# Altium PCB OneFader_Screen.PcbDoc
Units mm, origin at the board's own origin, x right, y up, seen from the top; angles counter-clockwise.
Board outline 62.1 x 43.6 mm, 2 copper layers (Top Layer, Bottom Layer); 12 components, 9 nets, 39 pads, 0 vias.
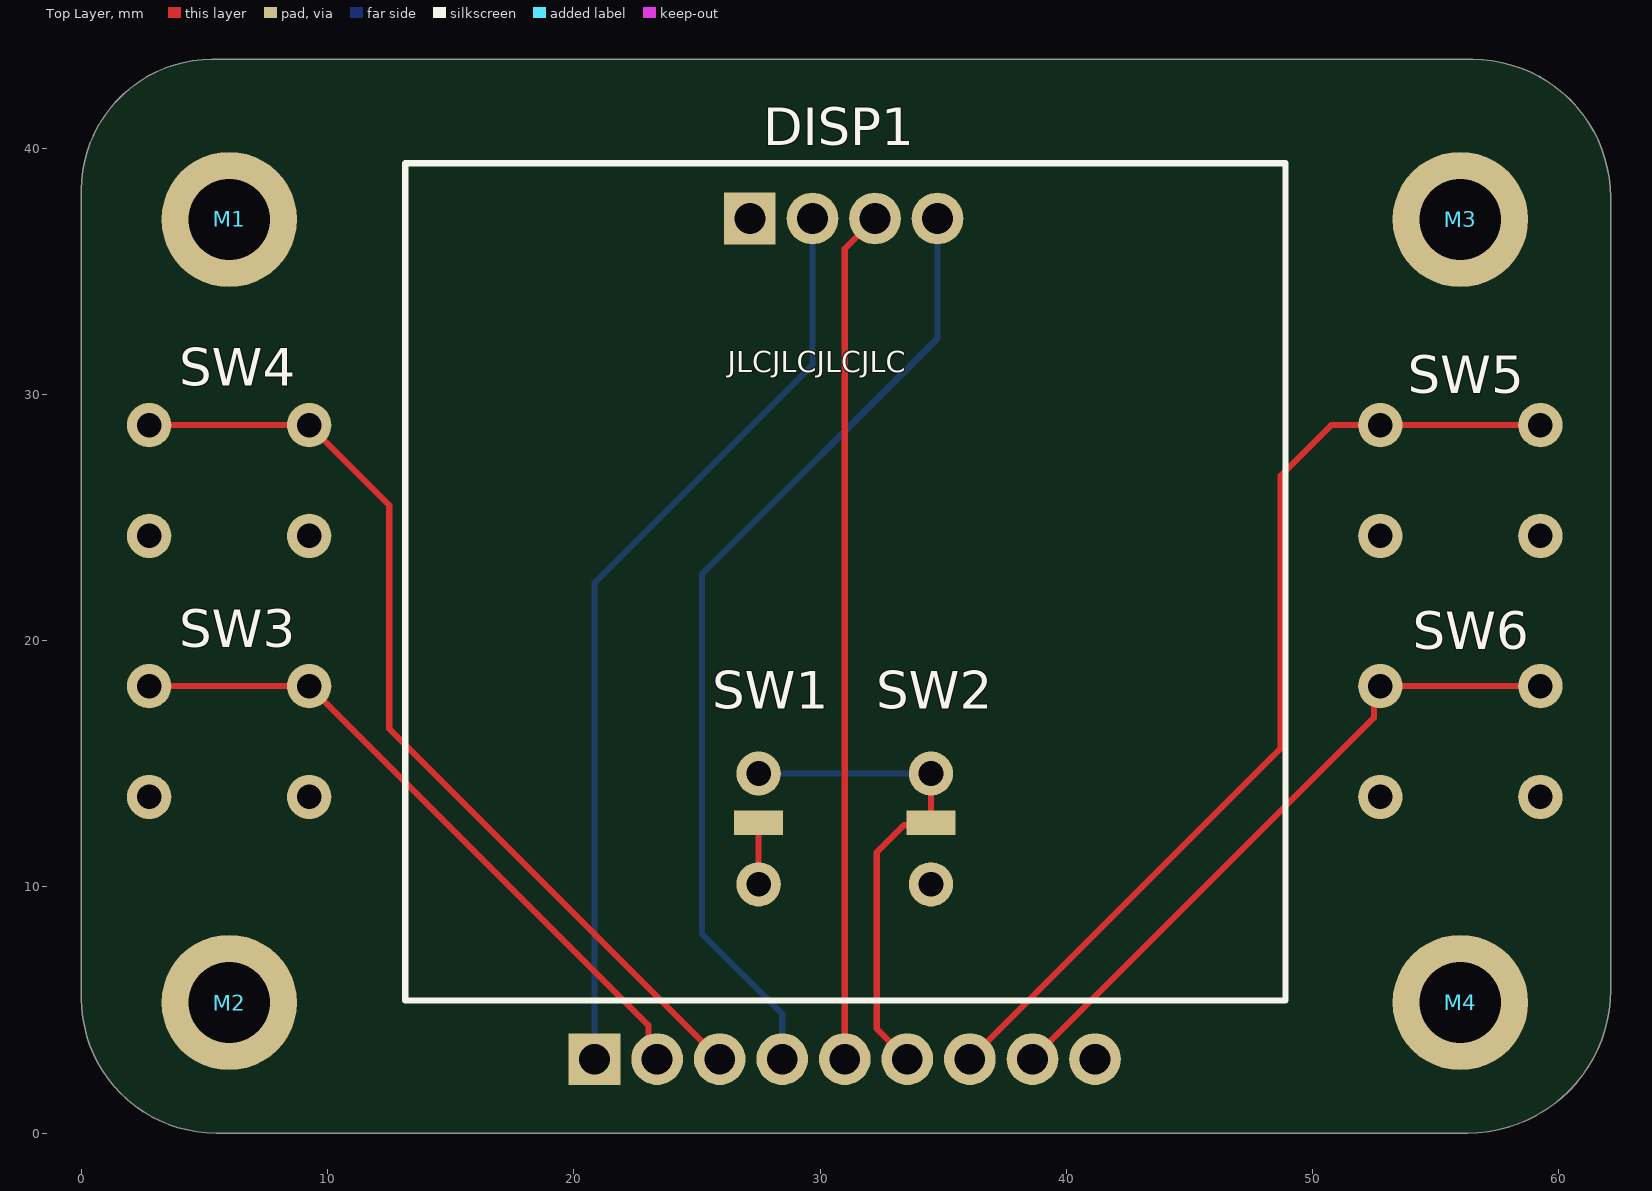
[diagram p0: Top Layer view]
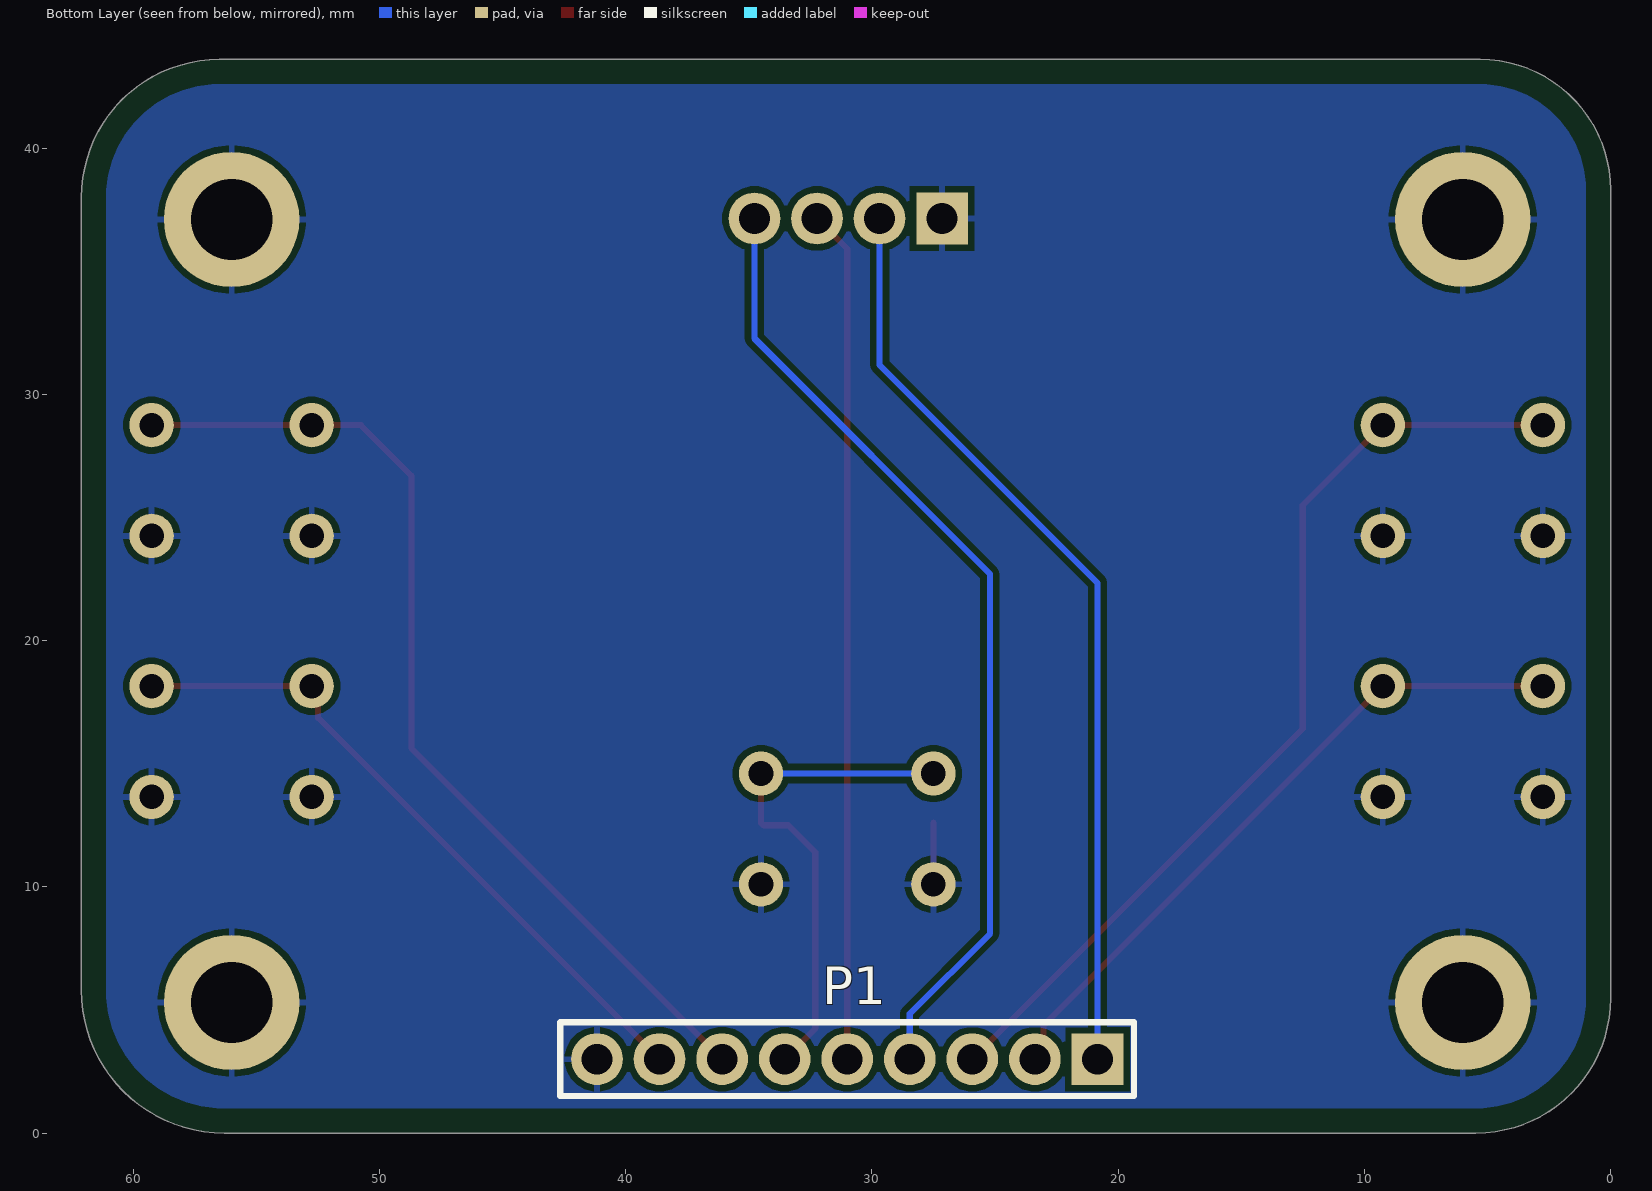
[diagram p1: Bottom Layer view, seen from below]

## Layer stack, top to bottom
Top Solder: solder mask 0.0102, Solder Resist, Dk 3.5
Top Layer: signal copper 0.0356
Dielectric 1: dielectric 0.32, FR-4, Dk 4.8
Bottom Layer: signal copper 0.0356
Bottom Solder: solder mask 0.0102, Solder Resist, Dk 3.5

## Board outline
5.465,0 56.3,0 ccw(c56.3,5.8) 62.1,5.8 62.1,38 ccw(c56.5,38) 56.5,43.6 5.3,43.6 ccw(c5.3,38.3) 0,38.3 0,5.465 ccw(c5.465,5.465)

## Design rules (kind name [scope] priority, off if disabled: settings)
BoardOutlineClearance [All] p1: gap=1 ignorepadtopadclearanceinfootprint=FALSE
Clearance [All] p1: gap=0.254 ignorepadtopadclearanceinfootprint=FALSE except(0: Arc-Hole Track-Hole SMDPad-Hole THPad-Hole Via-Hole Fill-Hole Poly-Hole Region-Hole Text-Hole)
HoleSize [All] p1: absolutevalues=TRUE maxlimit=5 minlimit=0.025 maxpercent=80.000 minpercent=20.000
MinimumSolderMaskSliver [All] p1: minsoldermaskwidth=0.1
PolygonConnect [All] p1: connectstyle=Relief reliefconductorwidth=0.254 reliefentries=4 polygonreliefangle="90 Angle" airgapwidth=0.254
RoutingVias [All] p1: holewidth=0.711 width=1.27 viastyle="Through Hole" minholewidth=0.711 minwidth=1.27 maxholewidth=0.711 maxwidth=1.27
SolderMaskExpansion [All] p1: expansion=0.102 istentingtop=FALSE
Width [All] p1: maxlimit=0.254 minlimit=0.254 preferedwidth=0.254
28 further rules are at their usual default settings.

## Components (designator, comment, footprint, x,y, rotation, side; value= is the part's Value field where it differs from the comment)
DISP1 "SSD1306" SSD1306_1.3 31,21.7 r0 top
M1 "M3 Flat Screw" "M3 Screw"#1 6,37.1 r0 top
M2 "M3 Flat Screw" "M3 Screw"#1 6,5.3 r0 top
M3 "M3 Flat Screw" "M3 Screw"#2 56,36.8 r0 top
M4 "M3 Flat Screw" "M3 Screw"#1 56,5.3 r0 top
P1 "9 Header" "9 Header" 31,3 r270 bottom
SW1 "Momentary Button" TD-19XA 31,12.6 r180 top
SW2 "Momentary Button" TS1127 31,12.6 r0 top
SW3 "Momentary Button" "Tactile Button 6*6*5mm" 6,15.9 r0 top
SW4 "Momentary Button" "Tactile Button 6*6*5mm" 6,26.5 r0 top
SW5 "Momentary Button" "Tactile Button 6*6*5mm" 56,26.5 r0 top
SW6 "Momentary Button" "Tactile Button 6*6*5mm" 56,15.9 r0 top

## Footprints (in the part's own frame and the unit in brackets; to place one, negate y for a bottom-side part, rotate by r counter-clockwise, add the part's x,y. Pads: shape width x height; smd on the part's side, far side on the other; paste and mask are expansions set on the pad)
"9 Header" [mm]
  rect 2.1x2.1 hole 1.25: 1(0,10.16)
  round 2.1 hole 1.25: 2(0,7.62) 3(0,5.08) 4(0,2.54) 5(0,0) 6(0,-2.54) 7(0,-5.08) 8(0,-7.62) 9(0,-10.16)
  silkscreen extent -1.5,-11.65 1.5,11.65, body extent -1.26,-11.42 1.28,11.44, height 6.54
"M3 Screw"#1 [mm]
  round 5.5 hole 3.3: 1(0,0)
  body extent -2.8,-2.8 2.8,2.8, height 2.37
"M3 Screw"#2 [mm]
  round 5.5 hole 3.3: 1(0,0.3)
  body extent -2.8,-2.8 2.8,2.8, height 2.37
SSD1306_1.3 [mm]
  rect 2.1x2.1 hole 1.25: 1(-3.853,15.436)
  round 2.1 hole 1.25: 2(-1.313,15.436) 3(1.227,15.436) 4(3.767,15.436)
  silkscreen extent -17.85,-16.31 17.9,17.69, body extent -17.85,-16.44 17.85,17.56, height 5.44
"Tactile Button 6*6*5mm" [mm]
  round 1.8 hole 1: 1(-3.25,2.25) 1(3.25,2.25) 2(-3.25,-2.25) 2(3.25,-2.25)
  body extent -3.9,-3.03 3.84,3, height 5.01
TD-19XA [mm] "TACT SWITCH 6.1*3.7*2.5MM SMD SPST-NO"
  rect 2x1 smd: 1(-3.5,0) 2(3.5,0)
  body extent -5,-1.75 5,1.75, height 3.25
TS1127 [mm] "TACT SWITCH 6.2*2.5 THROUGH HOLE SPST-NO RED BUTTON"
  round 1.8 hole 1: 1(-3.5,2) 1(3.5,2) 2(-3.5,-2.5) 2(3.5,-2.5)
  body extent -4,-3.2 4,3.2, height 2.5

## Part data
DISP1: library part SSD1306_1.3, "SSD1306 128*64 1.3Inch I2C OLED Module"

## Nets (pads, with @x,y where several pads share a name; then routed paths per layer and width w, separated by ;. In a path a pad name is that pad's centre, name@x,y a point inside that pad or via, vN(x,y) a via of type N, cw(c..) or ccw(c..) an arc to the next point about the centre after c; other vN are vias at no path point)
3V3: DISP1.2 P1.1 | length 37.8
  Bottom Layer w0.254: P1.1 20.84,22.34 29.687,31.187 DISP1.2
BUTTON_1: P1.6 SW1.1 SW2.1 | length 20.6
  Top Layer w0.254: P1.6 32.3,4.24 32.3,11.4 33.4,12.5 34.4,12.5 SW1.1 SW2.1@34.5,14.6
  Bottom Layer w0.254: SW2.1@27.5,14.6 SW2.1@34.5,14.6
BUTTON_2: P1.2 SW3.1 | length 27.5
  Top Layer w0.254: SW3.1@2.75,18.15 9.25,18.15 23.027,4.373 23.027,3.353 P1.2
BUTTON_3: P1.3 SW4.1 | length 39.2
  Top Layer w0.254: SW4.1@2.75,28.75 9.25,28.75 12.5,25.5 12.5,16.42 P1.3
BUTTON_4: P1.7 SW5.1 | length 40.3
  Top Layer w0.254: P1.7 48.7,15.62 48.7,26.7 50.75,28.75 52.75,28.75 SW5.1@59.25,28.75
BUTTON_5: P1.8 SW6.1 | length 27.5
  Top Layer w0.254: P1.8 52.489,16.869 52.489,17.889 52.75,18.15 SW6.1@59.25,18.15
GND: DISP1.1 M1.1 M2.1 M3.1 M4.1 P1.9 SW1.2 SW2.2 SW3.2 SW4.2 SW5.2 SW6.2 | length 2.5
  Top Layer w0.254: SW2.2@27.5,10.1 SW1.2
SCL: DISP1.3 P1.5 | length 34.6
  Top Layer w0.254: P1.5 31,35.909 DISP1.3
SDA: DISP1.4 P1.4 | length 39.4
  Bottom Layer w0.254: P1.4 28.46,4.84 25.2,8.1 25.2,22.7 34.767,32.267 DISP1.4

## Polygon pours and split planes (outlines as drawn)
GND on Bottom Layer "NONET_L-01_P-001" (solid, pour order 0): 0,0 0,43.6 62,43.6 62.1,43.5 62.1,-0.1

## Silkscreen, mask and mechanical layers (free items; w line width, h text height)
Top Overlay:
  text "JLCJLCJLCJLC" at 26.243,30.9 h0.85
Board Outline:
  lines w0.254: 0,5.5 ccw(c5.5,5.5) 5.5,0 56.5,0 ccw(c56.5,5.5) 62,5.5 62,38.1 ccw(c56.5,38.1) 56.5,43.6 5.5,43.6 ccw(c5.5,38.1) 0,38.1 0,5.5